# Altium PCB Smart Driver.PcbDoc
Units mil, origin at the board's own origin, x right, y up, seen from the top; angles counter-clockwise.
Board outline 2500 x 1100 mil, 2 copper layers (Top Layer, Bottom Layer); 15 components, 23 nets, 71 pads, 12 vias.
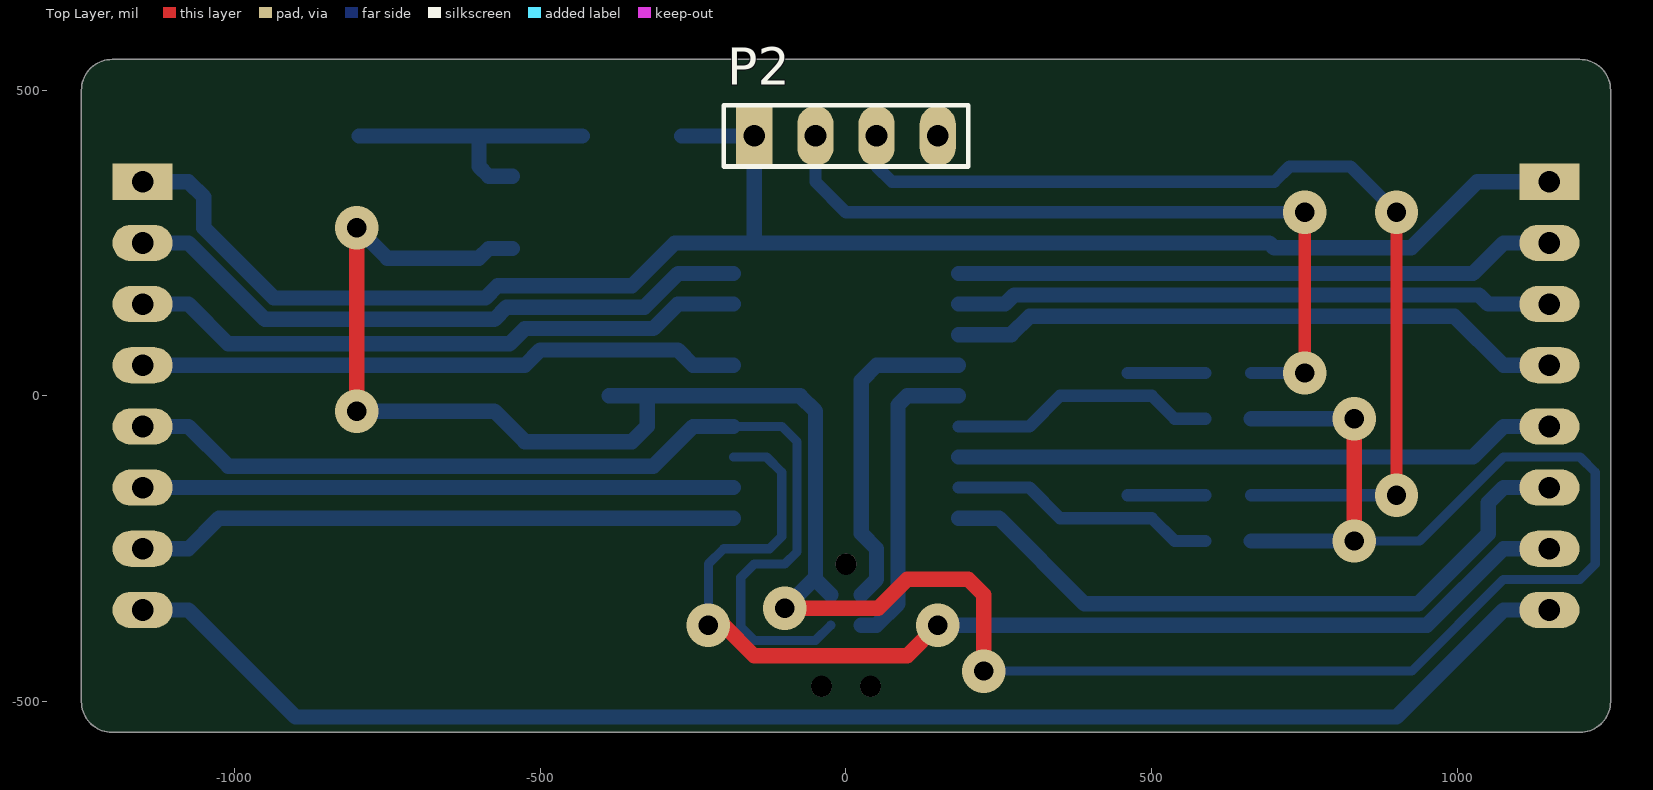
[diagram p0: Top Layer view]
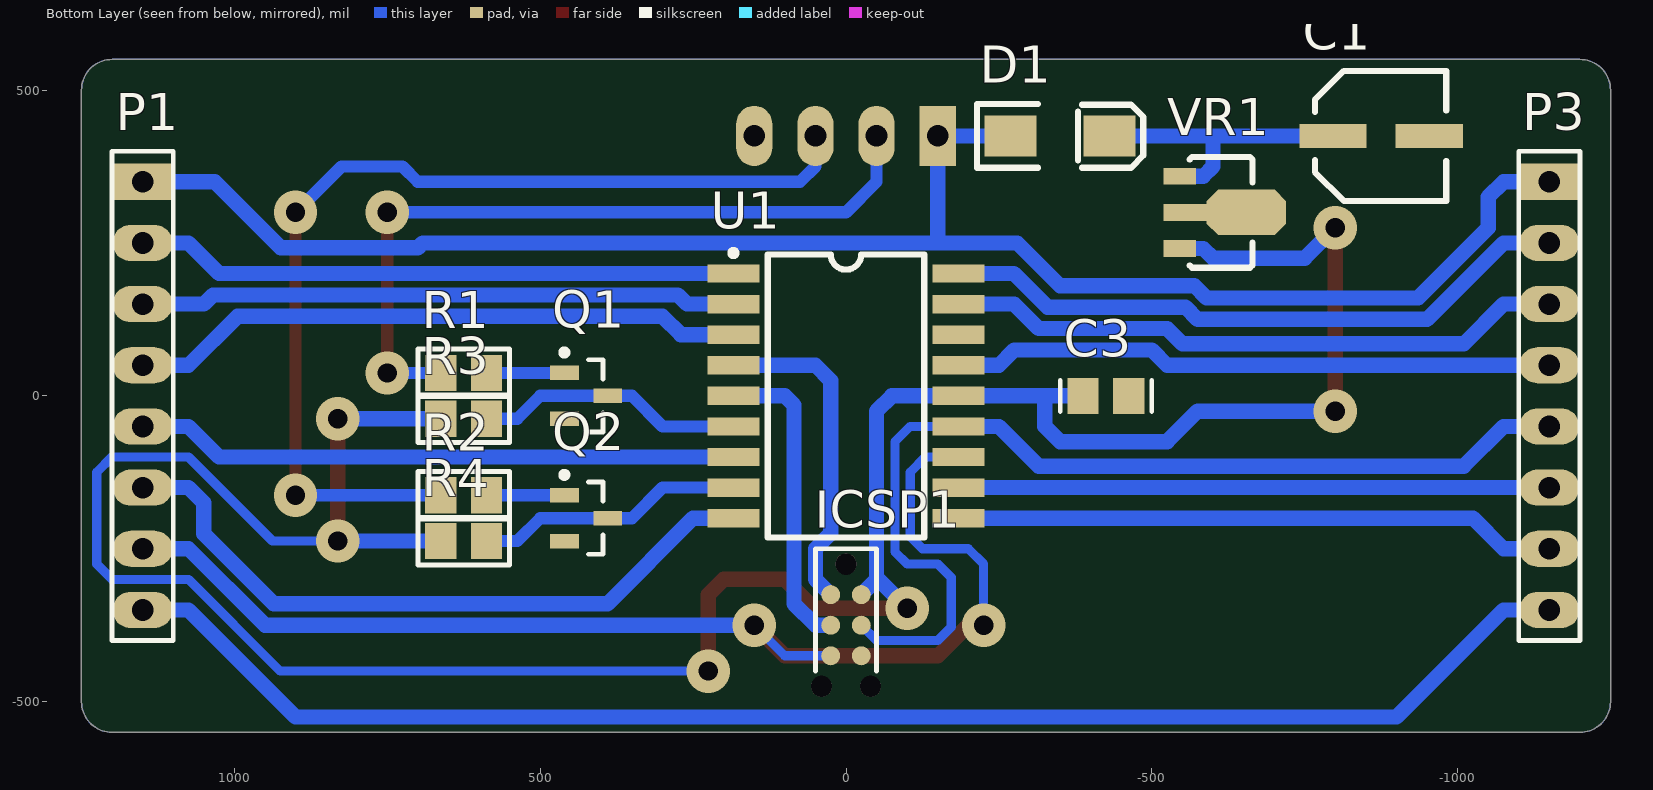
[diagram p1: Bottom Layer view, seen from below]

## Layer stack, top to bottom
Top Layer: signal copper 1.4
Dielectric: dielectric 12.6, FR-4, Dk 4.8
Bottom Layer: signal copper 1.4

## Board outline
-1250,-500 -1250,500 cw(c-1200,500) -1200,550 1200,550 cw(c1200,500) 1250,500 1250,-500 cw(c1200,-500) 1200,-550 -1200,-550 cw(c-1200,-500)

## Design rules (kind name [scope] priority, off if disabled: settings)
Clearance [All] p1: gap=10
PolygonConnect [All] p1: connectstyle=Relief reliefconductorwidth=10 reliefentries=4 polygonreliefangle="90 Angle" airgapwidth=10
RoomDefinition "Smart Driver" [InComponentClass('Smart Driver')] p1: confinementstyle=ConfineIn formatcopy=TRUE lockcomponents=FALSE outline -1200,-500 1200,-500 1200,500 -1200,500
RoutingVias [All] p1: holewidth=28 width=50 viastyle="Through Hole" minholewidth=12 minwidth=24 maxholewidth=50 maxwidth=100
SolderMaskExpansion [All] p1: expansion=4
Width [All] p1: maxlimit=100 minlimit=10 preferedwidth=10
28 further rules are at their usual default settings.

## Components (designator, comment, footprint, x,y, rotation, side; value= is the part's Value field where it differs from the comment)
C1 "10uF" "CAP ELECTRO SIZE-C" -875,425 r270 bottom
C3 "100nF" "CAP (3D) - 0805" -425,0 r0 bottom
D1 "S1M" DO-214AC -350,425 r180 bottom
ICSP1 "TAG CONNECT" "ICSP - TAG CONNECT TYPE2" 0,-275 r90 bottom
P1 "Header 8" HDR1X8 1150,350 r270 bottom
P2 "Header 4" HDR1X4 -150,425 r0 top
P3 "Header 8" HDR1X8 -1150,350 r270 bottom
Q1 "MMUN2211LT1" SOT23-3L 425,0 r180 bottom
Q2 "MMUN2211LT1" SOT23-3L 425,-200 r180 bottom
R1 "Res2" "RES (3D) - 0805" 625,37.4 r0 bottom
R2 "Res2" "RES (3D) - 0805" 625,-162.6 r0 bottom
R3 "Res2" "RES (3D) - 0805" 625,-37.4 r0 bottom
R4 "Res2" "RES (3D) - 0805" 625,-237.4 r0 bottom
U1 "PIC16F648A" SOIC-18 0,0 r270 bottom
VR1 "Volt Reg" SOT89 -600,300 r270 bottom

## Footprints (in the part's own frame and the unit in brackets; to place one, negate y for a bottom-side part, rotate by r counter-clockwise, add the part's x,y. Pads: shape width x height; smd on the part's side, far side on the other; paste and mask are expansions set on the pad)
"CAP (3D) - 0805" [mm]
  rect 1.3x1.5 smd: 1(-0.95,0) 2(0.95,0)
  silkscreen extent -1.9,-0.65 1.9,0.65, body extent -1,-0.63 1,0.63, height 1
"CAP ELECTRO SIZE-C" [mm]
  rect 1x2.8 smd: 1(0,-2) 2(0,2)
  silkscreen extent -2.7,-2.75 2.7,2.7, body extent -2.65,-2.95 2.65,2.95, height 5.41
DO-214AC [mil]
  rect 85x67 smd: 1(-81,0) 2(81,0)
  silkscreen extent -136,-52 136,52, body extent -79,-39 79,39, height 61
HDR1X4 [mm] "Connector; Header; 4 Position"
  rect 1.5x2.5 hole 0.9: 1(0,0)
  oval 1.5x2.5 hole 0.9: 2(2.54,0) 3(5.08,0) 4(7.62,0)
  silkscreen extent -1.27,-1.27 8.89,1.27
HDR1X8 [mm] "Connector; Header; 8 Position"
  rect 1.5x2.5 hole 0.9: 1(0,0)
  oval 1.5x2.5 hole 0.9: 2(2.54,0) 3(5.08,0) 4(7.62,0) 5(10.16,0) 6(12.7,0) 7(15.24,0) 8(17.78,0)
  silkscreen extent -1.27,-1.27 19.05,1.27
"ICSP - TAG CONNECT TYPE2" [mil] "ICSP - TAG CONNECT - TYPE 2"
  round 31 smd paste-40: 1(-50,25) 2(-50,-25) 3(-100,25) 4(-100,-25) 5(-150,25) 6(-150,-25)
  round 34 hole 35 unplated: A(0,0) B(-200,-40) C(-200,40)
  silkscreen extent -175,-50 25,50
"RES (3D) - 0805" [mm]
  rect 1.3x1.5 smd: 1(-0.95,0) 2(0.95,0)
  silkscreen extent -1.91,-0.99 1.91,0.99, body extent -1,-0.63 1,0.63, height 1
SOIC-18 [mil]
  rect 30x85 smd: 1(-200,-184.05) 2(-150,-184.05) 3(-100,-184.05) 4(-50,-184.05) 5(0,-184.05) 6(50,-184.05) 7(100,-184.05) 8(150,-184.05) 9(200,-184.05) 10(200,184.06) 11(150,184.06) 12(100,184.06) 13(50,184.06) 14(0,184.06) 15(-50,184.06) 16(-100,184.06) 17(-150,184.06) 18(-200,184.06)
  silkscreen extent -238,-189 231,128, body extent -236,-148 236,148, height 100
SOT23-3L [mm] "SOT23, 3-Leads, Body 2.9x1.3mm, Pitch 0.95mm, Lead Span 2.5mm, IPC High Density"
  rect 1.2x0.6 smd: 1(-0.9,0.95) 2(-0.9,-0.95) 3(0.9,0)
  silkscreen extent -1.02,-1.5 0.7,1.92, body extent -1.25,-1.5 1.25,1.5, height 1.12
SOT89 [mm]
  rect 0.7x1.35 smd: 1(1.5,-1.388) 3(-1.5,-1.388)
  rect 0.7x1.8 smd: 2(0,-1.163)
  oct 1.9x3.3 smd: 2(0,1.388)
  silkscreen extent -2.3,-0.97 2.3,1.63, body extent -2.3,-1.91 2.3,2.34, height 1.62

## Part data
C1: library part "Cap Pol", "CAPACITOR POLARISED TAG B CASE"
C3: library part CAP, "CAPACITOR SMD 0402"
D1: library part DIODE, "DIODE, POWER"
ICSP1: library part "ICSP - TAG CONNECT"
P1 P3: "Header, 8-Pin"
P2: "Header, 4-Pin"
Q1 Q2: library part "NPN DIGITAL TRANSISTOR"
R1 R2 R3 R4: "Resistor"
U1: library part PIC16F87/88, "PIC16F88"
VR1: "Voltage Regulator"

## Via types
v1: diameter 70.87, hole 31.5, Top Layer to Bottom Layer, 12 vias

## Nets (pads, with @x,y where several pads share a name; then routed paths per layer and width w, separated by ;. In a path a pad name is that pad's centre, name@x,y a point inside that pad or via, vN(x,y) a via of type N, cw(c..) or ccw(c..) an arc to the next point about the centre after c; other vN are vias at no path point)
BRAKE: Q1.3 R3.1 U1.6 | length 439.7
  Bottom Layer w20: U1.6 300,-50 350,0 Q1.3 500,0 537.4,-37.4 R3.1
BRAKE_IN: P2.2 R1.2 | length 1245.9
  Top Layer w20: v1(750,37.4) v1(750,300)
  Bottom Layer w20: P2.2 -50,350 0,300 v1(750,300) ; R1.2 v1(750,37.4)
DRIVE1: P1.2 U1.1 | length 986.7
  Bottom Layer w25: U1.1 1025,200 1075,250 P1.2
DRIVE2: P1.3 U1.2 | length 978.4
  Bottom Layer w25: U1.2 260,150 275,165 1035,165 1050,150 P1.3
DRIVE3: P1.4 U1.3 | length 1011.5
  Bottom Layer w25: U1.3 270,100 300,130 995,130 1075,50 P1.4
DRIVE4: P1.5 U1.7 | length 986.7
  Bottom Layer w25: U1.7 1025,-100 1075,-50 P1.5
DRIVE5: P1.6 U1.9 | length 1132.2
  Bottom Layer w25: U1.9 250,-200 390,-340 935.5,-340 1050,-225.5 1050,-175 1075,-150 P1.6
DRIVE6: ICSP1.5 P1.7 U1.12 | length 2047
  Top Layer w25: v1(-225,-375) -200,-375 -150,-425 100,-425 v1(150,-375)
  Bottom Layer w15: v1(-225,-375) -225,-275 -200,-250 -125,-250 -105,-230 -105,-125 -130,-100 U1.12 ; ICSP1.5 100,-425 v1(150,-375)
  Bottom Layer w25: v1(150,-375) 950,-375 1075,-250 P1.7
DRIVE7: P3.2 U1.18 | length 1048.8
  Bottom Layer w25: P3.2 -1075,250 -950,125 -575,125 -555,145 -329.5,145 -274.5,200 U1.18
DRIVE8: P3.3 U1.17 | length 1019.8
  Bottom Layer w25: P3.3 -1075,150 -1010,85 -550,85 -525,110 -315,110 -275,150 U1.17
DRIVE9: P3.4 U1.15 | length 986.7
  Bottom Layer w25: P3.4 -525,50 -500,75 -275,75 -250,50 U1.15
DRIVE10: ICSP1.4 P3.5 U1.13 | length 1671.1
  Bottom Layer w15: U1.13 -105,-50 -80,-75 -80,-255 -100,-275 -150,-275 -172.07,-297.07 -172.07,-377.93 -150,-400 -50,-400 ICSP1.4
  Bottom Layer w25: P3.5 -1075,-50 -1010,-115 -315,-115 -250,-50 U1.13
DRIVE11: P3.6 U1.11 | length 965.9
  Bottom Layer w25: P3.6 U1.11
DRIVE12: P3.7 U1.10 | length 986.7
  Bottom Layer w25: P3.7 -1075,-250 -1025,-200 U1.10
GND: C1.2 C3.1 ICSP1.3 P1.8 P2.4 P3.8 Q1.2 Q2.2 U1.5 VR1.2 | length 2949.7
  Bottom Layer w25: P3.8 -1075,-350 -900,-525 900,-525 1075,-350 P1.8 ; ICSP1.3 50,-375 85,-340 85,-15 100,0 U1.5
ICSP_VPP: ICSP1.1 U1.4 | length 540.1
  Bottom Layer w25: ICSP1.1 50,-300 50,-250 25,-225 25,25 50,50 U1.4
NetC1_1: C1.1 D1.2 VR1.3 | length 476.5
  Bottom Layer w25: C1.1 -600,425 ; VR1.3 -584.06,359.06 -600,375 -600,425 ; D1.2 -600,425
NetQ1_1: Q1.1 R1.1 | length 127.2
  Bottom Layer w20: Q1.1 R1.1
NetQ2_1: Q2.1 R2.1 | length 127.2
  Bottom Layer w20: Q2.1 R2.1
PARK: Q2.3 R4.1 U1.8 | length 439.7
  Bottom Layer w20: U1.8 300,-150 350,-200 Q2.3 500,-200 537.4,-237.4 R4.1
PARK_IN: P2.3 R2.2 | length 1664.4
  Top Layer w20: v1(900,-162.6) v1(900,300)
  Bottom Layer w20: P2.3 50,375 75,350 700,350 725,375 825,375 v1(900,300) ; R2.2 v1(900,-162.6) v1@912.4,-162.6
V+: D1.1 P1.1 P2.1 P3.1 | length 2787.6
  Bottom Layer w25: P3.1 -1075,350 -1050,325 -1050,274.5 -935.5,160 -589.5,160 -569.5,180 -350,180 -280,250 -150,250 ; D1.1 P2.1 -150,250 ; P1.1 1031.93,350 924,242.07 700,242.07 692.07,250 -150,250
VCC: C3.2 ICSP1.2 R3.2 R4.2 U1.14 VR1.1 | length 4579.1
  Top Layer w25: v1(-800,-25) v1(-800,275) ; v1(-100,-347.07) 52.93,-347.07 100,-300 200,-300 225,-325 v1(225,-450) ; v1@830.87,-250 v1(830.87,-237.4) v1(830.87,-37.4)
  Bottom Layer w15: v1(225,-450) 925,-450 1075,-300 1200,-300 1225,-275 1225,-125 1200,-100 1075,-100 937.6,-237.4 v1(830.87,-237.4)
  Bottom Layer w25: v1(-800,-25) -575,-25 -525,-75 -350,-75 -325,-50 -325,0 ; v1(-800,275) -750,225 -600,225 -584.05,240.95 VR1.1 ; C3.2 -325,0 ; v1(-100,-347.07) -52.93,-300 -50,-300 ; ICSP1.2 -50,-300 ; R4.2 v1(830.87,-237.4) ; R3.2 v1(830.87,-37.4) ; -325,0 U1.14 -75,0 -50,-25 -50,-300
pads on no net: ICSP1.6 ICSP1.A ICSP1.B ICSP1.C U1.16

## Polygon pours and split planes (outlines as drawn)
GND on Bottom Layer "Bottom Layer-No Net" (solid, remove dead copper, shelved): -1250,-500 -1250,500 cw(c-1200,500) -1200,550 1200,550 cw(c1200,500) 1250,500 1250,-500 cw(c1200,-500) 1200,-550 -1200,-550 cw(c-1200,-500)

## Silkscreen, mask and mechanical layers (free items; w line width, h text height)
Mechanical 1:
  lines w10: -1250,-500 ccw(c-1200,-500) -1200,-550 1200,-550 ccw(c1200,-500) 1250,-500 1250,-400 1250,400 1250,500 ccw(c1200,500) 1200,550 -1200,550 ccw(c-1200,500) -1250,500 -1250,400 -1250,-400 -1250,-500